# Altium PCB TelescopeHeater.PcbDoc
Units mil, origin at the board's own origin, x right, y up, seen from the top; angles counter-clockwise.
Board outline 984.14 x 1320.75 mil, 2 copper layers (Top Layer, Bottom Aluminium); 42 components, 25 nets, 118 pads, 0 vias.
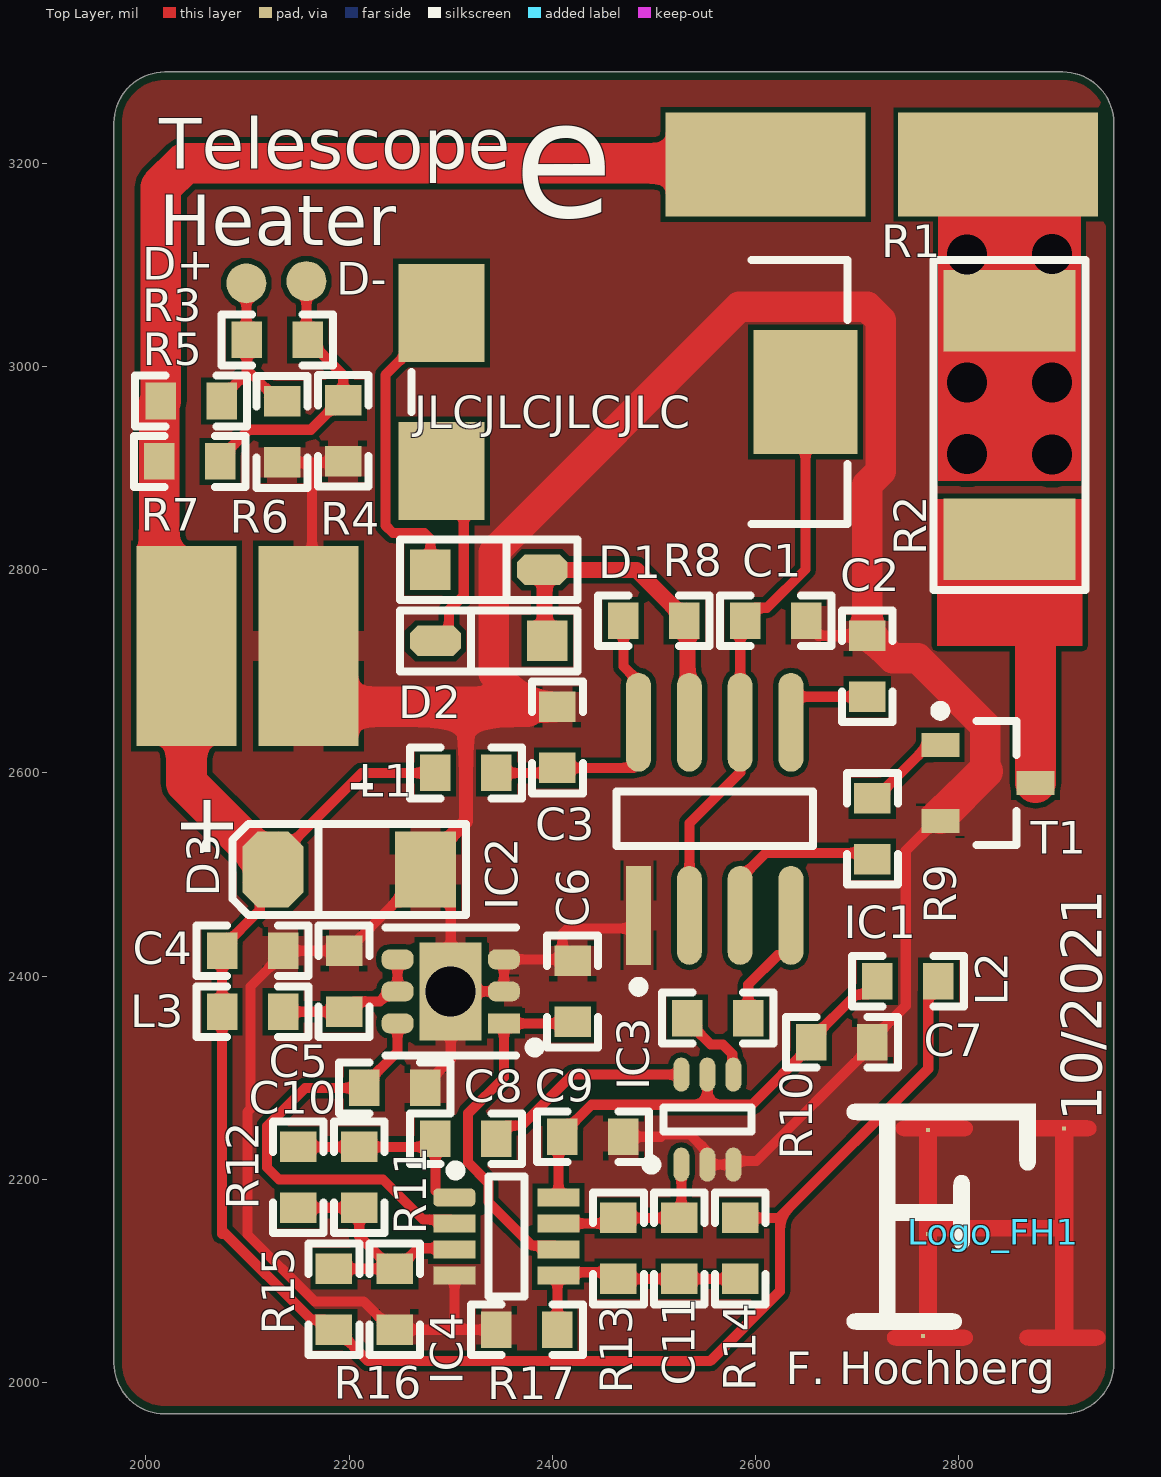
[diagram p0: Top Layer view]
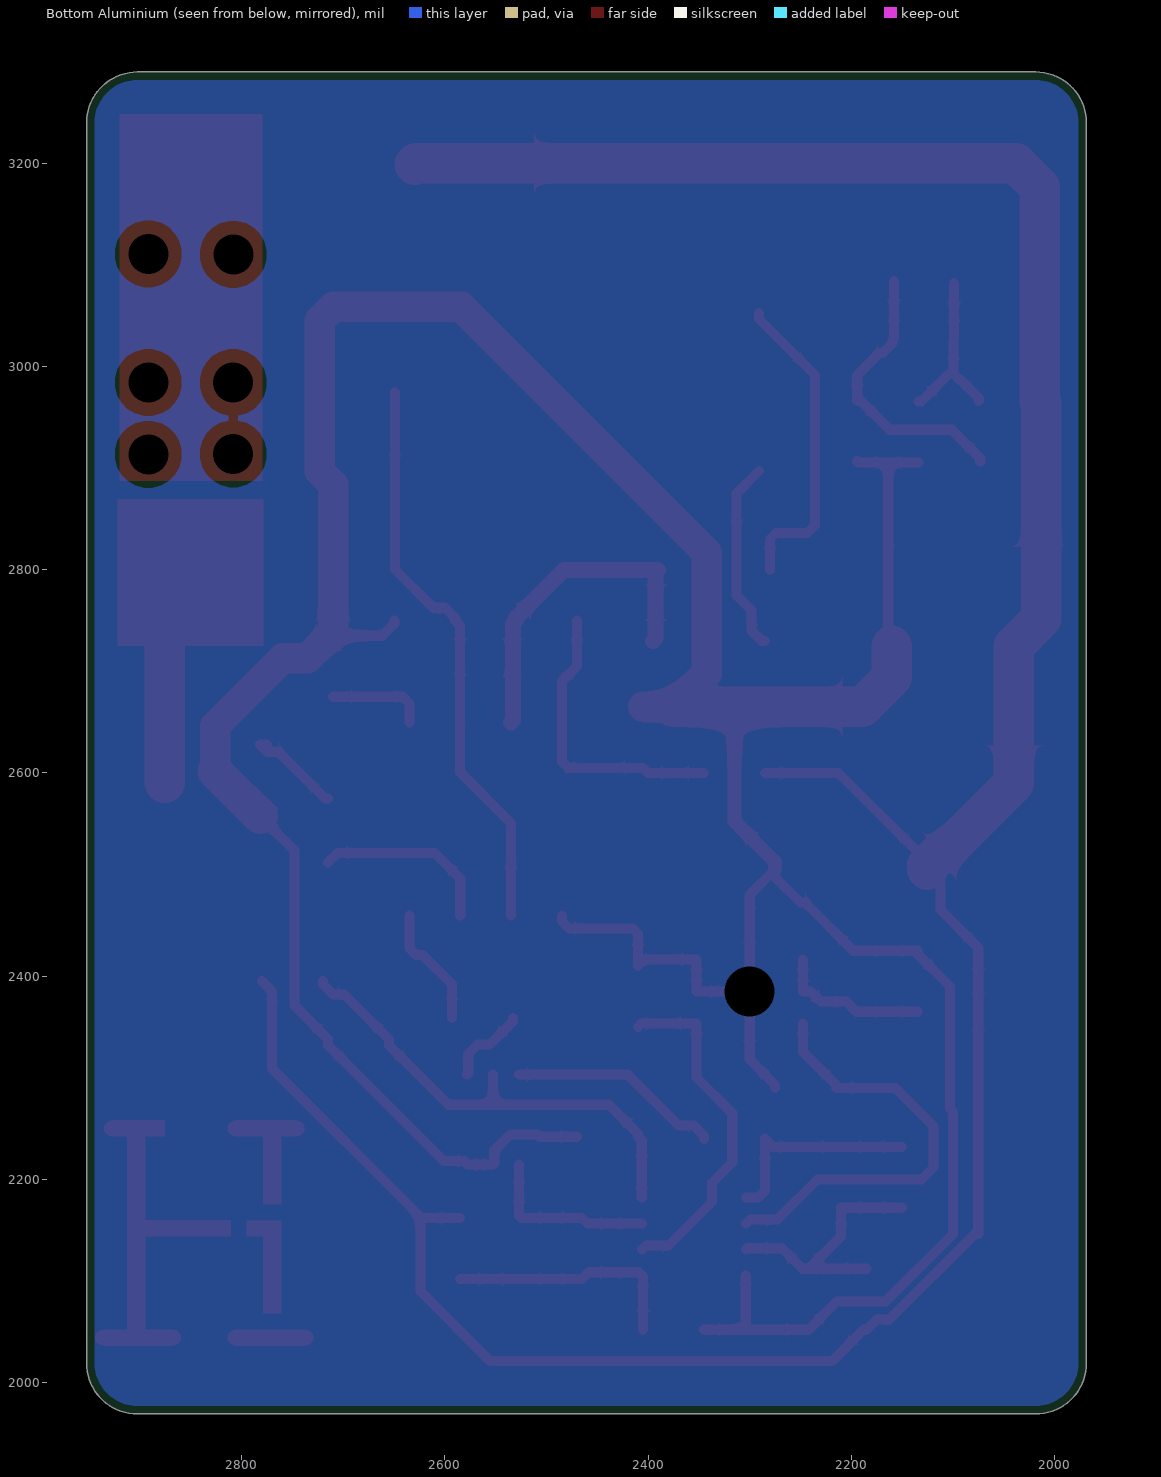
[diagram p1: Bottom Aluminium view, seen from below]
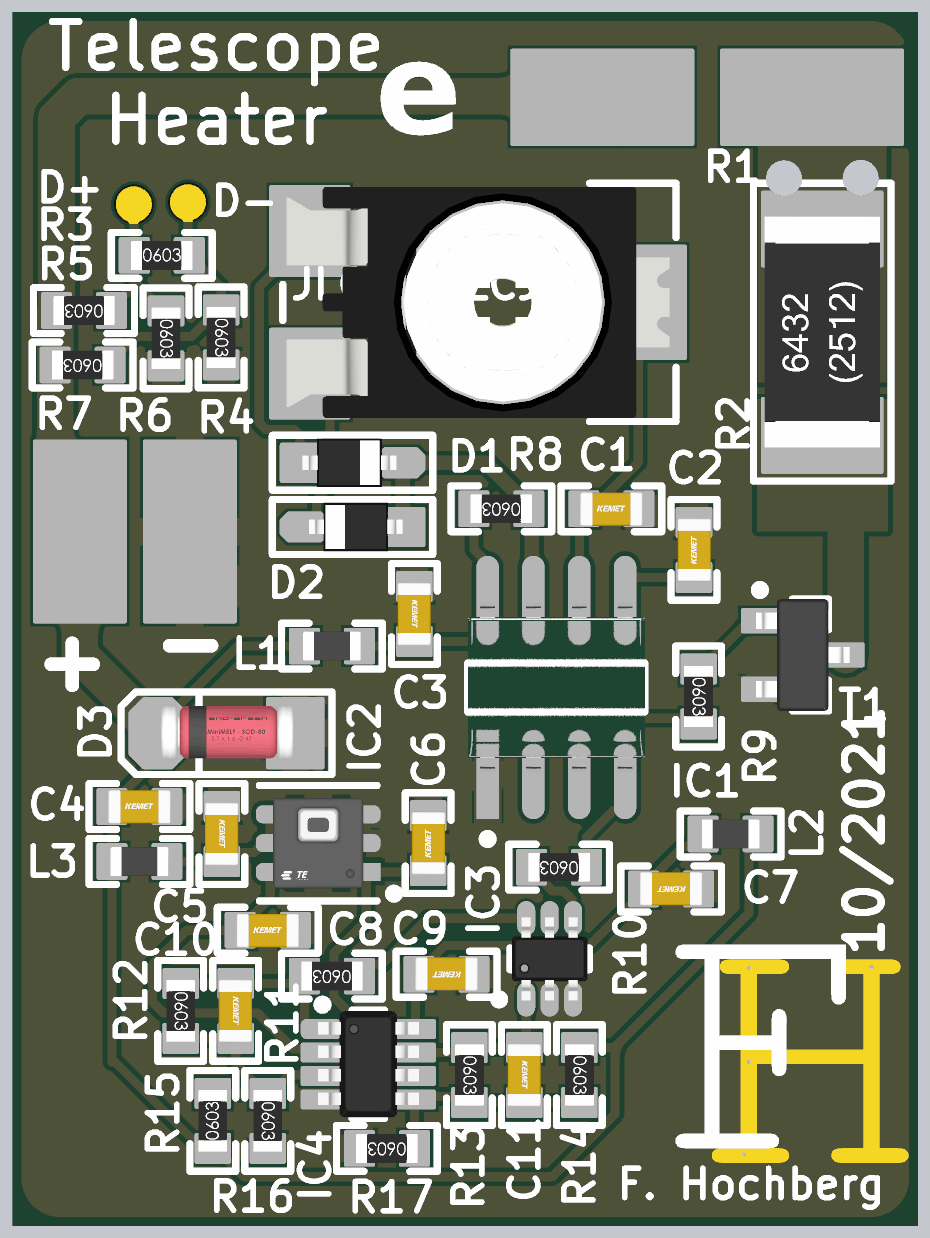
[diagram p2: 3D render of the assembled board from above, using the file's embedded part models]

## Layer stack, top to bottom
Top Solder: solder mask 0.4, Solder Resist, Dk 3.5
Top Layer: signal copper 1.4
Dielectric 1: dielectric 12.6, FR-4, Dk 4.8
Bottom Aluminium: signal copper 1.4

## Board outline
2018.53,1969.2 cw(c2018.53,2019.2) 1968.53,2019.2 1968.53,3239.95 cw(c2018.53,3239.95) 2018.53,3289.95 2902.57,3289.95 cw(c2902.57,3239.95) 2952.57,3239.95 2952.57,2979.8 cw(c2952.57,2979.68) 2952.68,2979.68 2952.68,2019.42 cw(c2952.57,2019.42) 2952.57,2019.31 ccw(c2952.68,2019.31) 2952.68,2019.2 cw(c2902.68,2019.2) 2902.68,1969.2

## Design rules (kind name [scope] priority, off if disabled: settings)
BoardOutlineClearance [All] p1: gap=7.87 ignorepadtopadclearanceinfootprint=FALSE except(15.75: Arc-SplitBarrior Arc-SplitContinuation Track-SplitBarrior Track-SplitContinuation SMDPad-SplitBarrior SMDPad-SplitContinuation THPad-SplitBarrior THPad-SplitContinuation Via-SplitBarrior Via-SplitContinuation Fill-SplitBarrior Fill-SplitContinuation Poly-SplitBarrior Poly-SplitContinuation Region-SplitBarrior Region-SplitContinuation Text-SplitBarrior Text-SplitContinuation)
Clearance [All] p1: gap=5 ignorepadtopadclearanceinfootprint=TRUE except(0: Arc-Text Track-Text Via-Text Fill-Text Poly-Text Region-Text Text-Text Text-Hole; 5.91: SMDPad-Text THPad-Text; 7.87: Arc-SMDPad Track-SMDPad; 10: Arc-Via Arc-Hole Track-Via Track-Hole SMDPad-THPad SMDPad-Via SMDPad-Hole Via-Via Via-Hole Fill-Hole Poly-Hole Region-Hole; 12.99: Arc-THPad Track-THPad THPad-Fill THPad-Poly THPad-Region Via-Fill Via-Poly Via-Region; 19.68: THPad-THPad THPad-Via THPad-Hole)
DiffPairsRouting [All] p1: maxlimit=10 minlimit=3.54 mostfreqgap=10 toplayer_minwidth=3.54 toplayer_maxwidth=15 toplayer_prefwidth=15 bottomlayer_minwidth=3.54 bottomlayer_maxwidth=15 bottomlayer_prefwidth=15 maxuncoupledlength=500
HoleSize [All] p1: absolutevalues=TRUE maxlimit=248.03 minlimit=11.81 maxpercent=80.000 minpercent=20.000
MinimumAnnularRing [All] p1: minimumring=5.12
MinimumSolderMaskSliver [All] p1: minsoldermaskwidth=3.94
PasteMaskExpansion [All] p1: expansion=1.97
PolygonConnect [All vs IsNamedPolygon('GND_L02_P002')] p1: thpad.connectstyle=Direct thpad.reliefconductorwidth=10 thpad.reliefentries=4 thpad.polygonreliefangle="90 Angle" thpad.airgapwidth=10 smdpad.connectstyle=Direct smdpad.reliefconductorwidth=10 smdpad.reliefentries=4 smdpad.polygonreliefangle="90 Angle" smdpad.airgapwidth=10 via.connectstyle=Relief via.reliefconductorwidth=10 via.reliefentries=4 via.polygonreliefangle="90 Angle" via.airgapwidth=10
PolygonConnect PolygonConnect_1 [All] p2: thpad.connectstyle=Relief thpad.reliefconductorwidth=30 thpad.reliefentries=4 thpad.polygonreliefangle="90 Angle" thpad.airgapwidth=5 smdpad.connectstyle=Relief smdpad.reliefconductorwidth=30 smdpad.reliefentries=4 smdpad.polygonreliefangle="90 Angle" smdpad.airgapwidth=5 via.connectstyle=Direct via.reliefconductorwidth=20 via.reliefentries=4 via.polygonreliefangle="90 Angle" via.airgapwidth=10
RoutingCorners [All] p1: cornerstyle=Round minsetback=100 maxsetback=100
RoutingVias [All] p1: holewidth=11.81 width=17.72 viastyle="Through Hole" minholewidth=11.81 minwidth=23.62 maxholewidth=248.03 maxwidth=78.74
SilkToSilkClearance [All] p1: silktosilkclearance=0
SilkToSolderMaskClearance [IsPad] p1: minsilkscreentomaskgap=1.97 clearancetoexposedcopper=TRUE
SolderMaskExpansion [All] p1: expansion=1.97 istentingtop=FALSE
UnRoutedNet [All] p1: checkbadconnections=TRUE
Width [All] p1: maxlimit=787.4 minlimit=5 preferedwidth=15 minimp=50.000000 maximp=50.000000 favimp=50.000000
22 further rules are at their usual default settings.

## Components (designator, comment, footprint, x,y, rotation, side; value= is the part's Value field where it differs from the comment)
C1 "4.7n_50V" 0603_C 2619.84,2749.82 r0 top value=4.7n (schematic designator C4)
C2 "10n_50V" 0603_C 2710,2705 r90 top value=10n (schematic designator C3)
C3 "100n_50V" 0603_C 2405,2635 r270 top value=100n (schematic designator C2)
C4 "1u_16V" 0603_C 2105,2425 r0 top value=1u (schematic designator C1)
C5 "100n_50V" 0603_C 2195,2395 r270 top value=100n
C6 "1n_50V" 0603_C 2420,2385 r90 top value=1n
C7 "100n_50V" 0603_C 2685,2335 r180 top value=100n (schematic designator C9)
C8 "1n_50V" 0603_C 2245,2290 r0 top value=1n (schematic designator C7)
C9 "100n_50V" 0603_C 2440,2241.99 r180 top value=100n (schematic designator C8)
C10 "2.2p_50V" 0603_C 2210,2201.99 r270 top value=2.2p (schematic designator C11)
C11 "2.2p_50V" 0603_C 2525,2131.99 r270 top value=2.2p (schematic designator C10)
D1 "CUS357" SOD323 2280,2800 r0 top (schematic designator D2)
D2 "CUS357" SOD323 2395,2730 r180 top (schematic designator D3)
D3 "5.6V" MINIMELF-SOD80 2125,2505 r0 top (schematic designator D1)
D+ "Testpad" Testpad_1mm 2098.88,3081.97 r90 top
D- "Testpad" Testpad_1mm 2157.95,3084.11 r180 top
IC1 "NE555DR" FP-D0008A-IPC_A 2559.84,2554.82 r90 top
IC2 "HTU31V" HTU31D/V-MFG 2300,2385 r180 top
IC3 "‎SN74LVC1G58DCKR‎" SOT-363 2578.17,2299.14 r90 top (schematic designator IC4)
IC4 "TLV9352" SOT23-8 2354.7,2143.77 r0 top (schematic designator IC3)
L1 "100 Ohm @ 100MHz" 0603_L 2315,2600 r180 top
L2 "100 Ohm @ 100MHz" 0603_L 2750,2395 r180 top (schematic designator L3)
L3 "100 Ohm @ 100MHz" 0603_L 2105,2365 r180 top (schematic designator L2)
Logo_FH1 "Logo" "Logo FH" 2807.95,2130.07 r0 top (schematic designator Logo_FH)
R1 "10k" PIHER_N-6-R_Poti 2470,2975 r180 top (schematic designator R2)
R2 "7.5" 2512_R 2850,2830 r90 top (schematic designator R5)
R3 "n.b." 0603_R 2129.31,3026.22 r0 top (schematic designator R15)
R4 "n.b." 0603_R 2194.16,2936.76 r270 top (schematic designator R17)
R5 "n.b." 0603_R 2044.49,2966.12 r180 top (schematic designator R13)
R6 "n.b." 0603_R 2134.01,2935.68 r270 top (schematic designator R14)
R7 "n.b." 0603_R 2043.05,2906.67 r180 top (schematic designator R16)
R8 "330" 0603_R 2499.84,2749.82 r180 top (schematic designator R1)
R9 "100" 0603_R 2715,2545 r270 top
R10 "0" 0603_R 2562.85,2358.76 r180 top (schematic designator R12)
R11 "0" 0603_R 2315,2240 r180 top (schematic designator R7)
R12 "330k" 0603_R 2150,2201.99 r270 top (schematic designator R8)
R13 "330k" 0603_R 2465,2131.99 r270 top (schematic designator R6)
R14 "22k" 0603_R 2585,2131.99 r270 top (schematic designator R3)
R15 "47k" 0603_R 2185,2081.99 r90 top (schematic designator R4)
R16 "33k" 0603_R 2245,2081.99 r270 top (schematic designator R11)
R17 "47k" 0603_R 2375,2051.99 r180 top (schematic designator R10)
T1 "Si2302CDS" SOT23-3 2828.72,2590.34 r0 top

## Footprints (in the part's own frame and the unit in brackets; to place one, negate y for a bottom-side part, rotate by r counter-clockwise, add the part's x,y. Pads: shape width x height; smd on the part's side, far side on the other; paste and mask are expansions set on the pad)
0603_C [mil] "Passiv"
  rect 30x36 smd: 1(-30,0) 2(30,0)
  silkscreen extent -55,-25 55,25, body extent -34,-19 34,18, height 35
0603_L [mil] "Passiv"
  rect 30x36 smd: 1(-30,0) 2(30,0)
  silkscreen extent -55,-25 55,25, body extent -32,-16 31,16, height 31
0603_R [mil] "Passiv"
  rect 30x36 smd: 1(-30,0) 2(30,0)
  silkscreen extent -55,-25 55,25, body extent -33,-16 33,16, height 22
2512_R [mil]
  rect 80x130 smd: 1(0,0) 2(225,0)
  silkscreen extent -50,-75 275,75, body extent -13,-63 238,63, height 24
FP-D0008A-IPC_A [mil]
  rect 97.21x24.49 smd paste+0 mask+0: 1(-95.02,75)
  rrect100% 97.21x24.49 smd paste+0 mask+0: 2(-95.02,25) 3(-95.02,-25) 4(-95.02,-75) 5(95.02,-75) 6(95.02,-25) 7(95.02,25) 8(95.02,75)
  silkscreen extent -170,-97 27,97, body extent -163,-116 163,116, height 10
HTU31D/V-MFG [mm]
  rect 0.8x0.5 smd paste+0 mask+0: 1(-1.33,0.8)
  rrect80% 0.8x0.5 smd paste+0 mask+0: 2(-1.33,0) 3(-1.33,-0.8) 4(1.33,-0.8) 5(1.33,0) 6(1.33,0.8)
  rect 1.55x2.45 smd paste+0 mask+0: 7(0,0)
  silkscreen extent -2.23,-1.6 1.63,1.6, body extent -1.63,-1.38 1.63,1.38, height 0.25
"Logo FH" [mm]
  rect 0.1x0.1 smd paste+0 mask+0: 1(-0.97,3.004) 2(2.43,3.05) 3(-0.97,0.41) 4(-1.1,-2.14)
  Top Layer region: -1.679,2.888 -1.668,2.882 -1.656,2.877 -1.643,2.873 -1.63,2.869 -1.617,2.865 -1.604,2.862 -1.591,2.86 -1.578,2.857 -1.566,2.856 -1.553,2.854 -1.539,2.853 -1.525,2.852 -1.511,2.851 -1.498,2.851 -1.485,2.85 -1.471,2.85 -1.193,2.85 -1.193,1.152 -0.747,1.152 -0.747,2.85 -0.147,2.85 -0.134,2.85 -0.121,2.851 -0.107,2.851 -0.093,2.852 -0.079,2.853 -0.066,2.854 -0.054,2.856 -0.04,2.858 -0.027,2.86 -0.014,2.863 0,2.866 0.012,2.87 0.025,2.874 0.037,2.879 0.049,2.884 0.061,2.89 0.073,2.898 0.084,2.906 0.095,2.916 0.104,2.925 0.112,2.936 0.117,2.943 0.122,2.949 0.122,2.949 0.129,2.963 0.136,2.977 0.136,2.977 0.139,2.985 0.141,2.992 0.141,2.992 0.144,3.004 0.147,3.019 0.149,3.033 0.149,3.046 0.149,3.059 0.149,3.072 0.147,3.086 0.144,3.1 0.142,3.107 0.14,3.115 0.14,3.115 0.131,3.135 0.121,3.153 0.121,3.153 0.117,3.159 0.113,3.164 0.113,3.164 0.104,3.175 0.095,3.184 0.085,3.192 0.074,3.201 0.063,3.209 0.051,3.216 0.04,3.221 0.027,3.227 0.015,3.231 0.002,3.235 -0.011,3.239 -0.024,3.242 -0.037,3.245 -0.051,3.247 -0.065,3.249 -0.078,3.25 -0.091,3.251 -0.105,3.252 -0.119,3.253 -0.132,3.253 -0.145,3.253 -1.47,3.253 -1.483,3.253 -1.497,3.253 -1.51,3.252 -1.524,3.252 -1.538,3.251 -1.551,3.249 -1.564,3.248 -1.577,3.246 -1.591,3.243 -1.604,3.24 -1.617,3.237 -1.63,3.233 -1.642,3.229 -1.654,3.224 -1.667,3.219 -1.678,3.212 -1.69,3.205 -1.701,3.197 -1.712,3.188 -1.722,3.178 -1.728,3.173 -1.733,3.167 -1.733,3.167 -1.745,3.149 -1.755,3.131 -1.755,3.131 -1.758,3.124 -1.761,3.118 -1.761,3.118 -1.765,3.105 -1.768,3.092 -1.77,3.079 -1.771,3.066 -1.771,3.053 -1.771,3.039 -1.77,3.026 -1.768,3.012 -1.765,2.999 -1.762,2.991 -1.76,2.983 -1.76,2.983 -1.754,2.969 -1.747,2.956 -1.747,2.956 -1.743,2.949 -1.739,2.942 -1.739,2.942 -1.731,2.932 -1.721,2.921 -1.711,2.91 -1.701,2.902 -1.691,2.895
  Top Layer region: 183 vertices and 0 holes, not listed, extent 0.077,-2.382 3.461,3.253
  Top Layer region: -1.91,-2.336 -1.898,-2.343 -1.886,-2.349 -1.874,-2.355 -1.862,-2.359 -1.85,-2.363 -1.836,-2.367 -1.824,-2.37 -1.811,-2.373 -1.797,-2.375 -1.783,-2.377 -1.77,-2.379 -1.757,-2.38 -1.743,-2.381 -1.729,-2.382 -1.716,-2.382 -1.703,-2.382 -0.146,-2.382 -0.133,-2.382 -0.12,-2.382 -0.106,-2.381 -0.092,-2.38 -0.078,-2.379 -0.065,-2.378 -0.053,-2.376 -0.039,-2.374 -0.026,-2.371 -0.013,-2.368 0,-2.365 0.013,-2.361 0.025,-2.356 0.038,-2.351 0.05,-2.345 0.062,-2.338 0.073,-2.331 0.083,-2.322 0.094,-2.313 0.103,-2.303 0.111,-2.294 0.119,-2.283 0.123,-2.277 0.127,-2.271 0.127,-2.271 0.133,-2.258 0.138,-2.246 0.138,-2.246 0.141,-2.239 0.143,-2.232 0.143,-2.232 0.146,-2.218 0.148,-2.205 0.149,-2.192 0.15,-2.178 0.149,-2.165 0.148,-2.152 0.146,-2.139 0.142,-2.126 0.14,-2.118 0.137,-2.111 0.138,-2.111 0.13,-2.095 0.121,-2.079 0.121,-2.079 0.117,-2.074 0.113,-2.068 0.113,-2.068 0.104,-2.057 0.095,-2.048 0.085,-2.04 0.074,-2.031 0.063,-2.024 0.051,-2.017 0.04,-2.011 0.027,-2.006 0.015,-2.001 0.002,-1.997 -0.011,-1.993 -0.024,-1.99 -0.037,-1.988 -0.051,-1.986 -0.065,-1.984 -0.078,-1.982 -0.091,-1.981 -0.105,-1.98 -0.119,-1.98 -0.132,-1.979 -0.145,-1.979 -1.697,-1.979 -1.71,-1.979 -1.723,-1.979 -1.737,-1.98 -1.751,-1.981 -1.765,-1.982 -1.778,-1.983 -1.791,-1.985 -1.804,-1.987 -1.818,-1.99 -1.83,-1.993 -1.844,-1.996 -1.857,-2 -1.869,-2.004 -1.882,-2.01 -1.893,-2.016 -1.905,-2.022 -1.916,-2.029 -1.927,-2.038 -1.938,-2.047 -1.949,-2.057 -1.953,-2.063 -1.958,-2.068 -1.958,-2.068 -1.969,-2.084 -1.978,-2.102 -1.978,-2.102 -1.981,-2.108 -1.984,-2.114 -1.984,-2.114 -1.988,-2.128 -1.991,-2.14 -1.993,-2.153 -1.994,-2.166 -1.994,-2.179 -1.994,-2.193 -1.993,-2.206 -1.991,-2.22 -1.989,-2.227 -1.987,-2.235 -1.987,-2.235 -1.982,-2.249 -1.976,-2.262 -1.976,-2.262 -1.972,-2.269 -1.968,-2.276 -1.968,-2.276 -1.96,-2.288 -1.951,-2.299 -1.942,-2.309 -1.932,-2.319 -1.921,-2.328
  Top Layer region: -1.193,-1.574 -0.747,-1.574 -0.747,0.354 -0.333,0.354 -0.333,0.746 -1.193,0.746
  Top Layer lines w0.2: 2.88,2.97 2.96,2.97
  silkscreen extent -3,-1.98 1.73,3.67
MINIMELF-SOD80 [mil] "Diode"
  rect 60x75 smd: 1(150,0)
  oct 60x75 smd: 2(0,0)
  silkscreen extent -40,-45 190,45, body extent 3,-30 149,33, height 63
PIHER_N-6-R_Poti [mm]
  rect 2.15x2.45 smd: 1(4.55,1.975) 2(4.55,-1.975)
  rect 2.6x3.1 smd: 3(-4.55,0)
  silkscreen extent -5.6,-3.3 5.3,3.3, body extent -5.42,-3.2 5.19,3.2, height 6.2
SOD323 [mil] "Diode (zus. Namen: SC-90A)"
  rect 40x40 smd: 1(0,0)
  oct 50x30 smd: 2(110,0)
  silkscreen extent -30,-30 145,30, body extent 3,-27 105,27, height 43
SOT23-3 [mm]
  rect 0.95x0.6 smd: 1(-1.19,0.95) 2(-1.19,-0.95) 3(1.19,0)
  silkscreen extent -1.31,-1.55 0.71,1.92, body extent -1.3,-1.55 1.3,1.55, height 1.15
SOT23-8 [mm] "SOT23, 8-Leads, Body 2,90x2,80mm, Pitch 0,65mm, IPC High Density"
  rrect50% 1.05x0.45 smd: 1(-1.3,0.975)
  rect 1.05x0.45 smd: 2(-1.3,0.325) 3(-1.3,-0.325) 4(-1.3,-0.975) 5(1.3,-0.975) 6(1.3,-0.325) 7(1.3,0.325) 8(1.3,0.975)
  silkscreen extent -1.39,-1.5 0.45,1.78, body extent -1.4,-1.47 1.4,1.47, height 1.2
SOT-363 [mm] "SC-88 SC70-6"
  oval 0.85x0.4 smd: 1(-2.15,1.3) 2(-2.15,0.65) 3(-2.15,0) 4(0.1,0) 5(0.1,0.65) 6(0.1,1.3)
  silkscreen extent -2.27,-0.45 -0.72,2.17, body extent -2.17,-0.4 0.13,1.7, height 1
Testpad_1mm [mm]
  round 1 smd paste-2: 1(0,0)

## Part data
C1 C2 C3 C5 C6 C7 C8 C9 C10 C11: library part C, "Keramikkondensator", Voltage=50V
C4: library part C, "Keramikkondensator", Voltage=16V
D1 D2: library part "Schottky Diode", "Schottky Diode"
D3: library part "Zener Diode", "Zener Diode", Voltage=5.6V
IC1: library part CMP-1685-00007-2, "IC OSC SGL TIMER 100KHZ 8-SOIC", Case/Package=SOIC, Frequency=100kHz, High Level Output Current=-200mA, Low Level Output Current=200mA, Max Operating Temperature=70°C, Max Supply Voltage=16V, Min Operating Temperature=0°C, Min Supply Voltage=4.5V, Operating Supply Current=10mA, Package Quantity=2500, Quiescent Current=15mA, Contact Plating=Gold, Height=1.58mm, Lead Free="Lead Free", Length=4.9mm, Mount="Surface Mount", Number of Pins=8, Number of Timers/Counters=1, Packaging="Tape and Reel", Radiation Hardening=No, REACH SVHC="No SVHC", Weight=0.002561oz, Width=3.91mm
IC2: library part "HTU31V RH/T", "Analog Relative Humidity sensor with Temperature output", Ambient Temperature Range High=+125°C, Ambient Temperature Range Low=-40°C, Manufacturer=TE, Manufacturer Part Number=HTU31D, Max Supply Voltage=5.5V, Min Supply Voltage=3V, Operating Supply Current=450uA, Package=0, Temperature="-40°C to +125°C", Accuracy=2%, Automotive=Yes, Automotive Grade="Grade 1", Category=IC, ComponentLink2Description=Datasheet, ComponentLink2URL=https://www.te.com/commerce/DocumentDelivery/DDEController?Action=showdoc&DocId=Data+Sheet%7FHTU31D-RHT-SENSOR-IC-DIGITAL%7FA1%7Fpdf%7FEnglish%7FENG_DS_HTU31D-RHT-SENSOR-IC-DIGITAL_A1.pdf%7F10142020-00, Device Class L1=Sensors, Device Class L2="Temperature and Humidity Sensors", Device Class L3=unset, Height=1mm, Interface=Analog, Ipc Land Pattern Name=DFN250X250X100-6, Lead Free=Yes, Octopart=https://octopart.com/htu31d-te+connectivity-108994149, RoHS=TRUE, Sensor Output=I2C, Standoff Height=0mm, Temperature Range High=+125°C, Temperature Range Low=-40°C
IC3: library part "Conf. Logic Gate", "Low-power configurable multiple function gate"
IC4: library part "Dual OP Amp", "OP / Comparator"
L1 L2 L3: library part L, "0,15 Ohm 1A max / 100 Ohm @ 100MHz", EBS_Nummer=10111, HelpURL=https://ebs.eti.kit.edu/Artikel/Detailansicht/10111
Logo_FH1: "8x8 mm Logo Fabian Hochberg"
R1: library part Poti, "Poti"
R2 R3 R4 R5 R6 R7 R8 R9 R10 R11 R12 R13 R14 R15 R16 R17: library part R, "R"
T1: library part "Signal N-MOSFET", "N-Channel 20-V (D-S) MOSFET"

## Free pads (board coordinates)
  rect 98.43x196.85 smd: 1(2040,2725) 2(2160,2725)
  rect 196.85x102.36 smd: 3(2610,3198.82) 4(2838.88,3198.82)
  round 0 hole 49.21 unplated paste-99999 mask+0: q(2300,2385)
  round 31.5 hole 39.37 unplated: q(2808.29,3110.46) q(2808.31,2914.07) q(2808.31,2984.25) q(2891.93,2913.64) q(2891.93,2984.25) q(2891.94,3110.88)

## Nets (pads, with @x,y where several pads share a name; then routed paths per layer and width w, separated by ;. In a path a pad name is that pad's centre, name@x,y a point inside that pad or via, vN(x,y) a via of type N, cw(c..) or ccw(c..) an arc to the next point about the centre after c; other vN are vias at no path point)
+5: C4.1 D3.2 L1.2 L2.1 L3.2 pad.1 pad.3 R5.2 R7.2 R14.1 R15.1 | length 2962.8
  Top Layer w10: 2075,2146.41 2075,2252.73 L3.2 C4.1 2075,2428 2112.07,2465.07 2112.07,2492.07 D3.2 ; 2076.58,2147.99 2162.58,2061.99 2175,2061.99 R15.1 2188,2051.99 2218.87,2021.12 2555.33,2021.12 2623.99,2089.78 2623.99,2162.89 ; D3.2@2125,2509.22 2125,2512.5 2212.5,2600 L1.2 ; R14.1 2623.1,2161.99 2623.99,2162.89 ; L2.1 2770,2385 2770,2308.89 2623.99,2162.89
  Top Layer w40: D3.2 2125,2509.22 2115,2519.22 2110.78,2519.22 2040,2590 pad.1 2013.05,2751.95 R7.2 2013.05,2964.68 R5.2 2014.49,3176.57 2037.92,3200 2628.48,3200 pad.3@2629.66,3198.82
+5_ANALOG: C7.2 C9.2 IC3.5 IC4.8 L2.2 | length 471.6
  Top Layer w10: IC4.8 2406.18,2182.46 2406.18,2238.18 C9.2 2410,2244.99 2438.48,2273.48 2552.57,2273.48 ; IC3.5 2552.57,2273.48 ; L2.2 2720,2392 2710,2382 2699,2382 2655,2338 C7.2 2655,2332 2596.48,2273.48 2552.57,2273.48
D+: D+.1 R3.1 R5.1 R6.1 | length 172.8
  Top Layer w10: R5.1 2074.49,2969.12 2091.56,2986.19 2092.28,2986.19 2099.31,2993.22 ; D+.1 2098.88,3026.65 R3.1 2099.31,2993.22 ; R6.1 2131.01,2965.68 2103.47,2993.22 2099.31,2993.22
D-: D-.1 R3.2 R4.1 R7.1 | length 281.9
  Top Layer w10: R7.1 2073.05,2909.67 2101.18,2937.81 2162.22,2937.81 2191.16,2966.76 R4.1 2194.16,2991.36 2172.31,3013.22 2169.31,3013.22 2159.31,3023.22 R3.2 2157.95,3027.58 D-.1
GND: C1.2 C2.2 C3.1 C4.2 C5.1 C6.2 C7.1 C8.2 C9.1 D3.1 IC1.1 IC2.2 IC2.3 IC2.7 IC3.2 IC3.3 IC4.4 Logo_FH1.1 Logo_FH1.2 Logo_FH1.3 Logo_FH1.4 pad.2 pad.q@2300,2385 R4.2 R6.2 R16.2 R17.2 T1.2 | length 3881.3
  Top Layer w10: R6.2 2163.55,2905.68 ; pad.2 2163.55,2728.55 2163.55,2905.68 ; R4.2 2193.09,2905.68 2163.55,2905.68 ; C8.2 2275,2293 2300,2318 IC2.7 ; IC4.4 2303.82,2105.08 2303.82,2058.18 2310,2051.99 ; R17.2 2310,2051.99 ; C9.1 2506.73,2241.99 2508.84,2244.11 2535.58,2244.11 2551.48,2228.21 2551.48,2215.6 IC3.2 IC3.3 2578.17,2215.38 2580.82,2218.04 2601.04,2218.04 2715,2332 C7.1 2715,2338 2747.87,2370.87 2747.87,2523.43 2768.17,2543.73 2768.17,2546.13 2779.47,2557.43 T1.2@2781.87,2557.43 ; IC1.1 2484.84,2454.22 2477.6,2446.97 2415.02,2446.97 2410,2441.95 2410,2410 2403.5,2416.5 IC2.3 IC2.2 IC2.7 ; C1.2 2649.84,2746.82 2661.66,2735 C2.2 ; IC2.7 2300,2480 D3.1 2275,2497.5 2250,2472.5 2245.5,2472.5 2198,2425 C5.1 C4.2 2135,2422 2102.87,2389.87 2102.87,2269.27 2100,2266.39 2100,2145.79 2165.92,2079.87 2214.13,2079.87 2242,2051.99 R16.2 2310,2051.99
  Top Layer w14: D3.1 2275,2512.5 2315,2552.5 2315,2665
  Top Layer w30: C3.1 2375,2665 2342.13,2697.87 2342.13,2816.97 2584.05,3058.9 2709.79,3058.9 2723.19,3045.5 2723.19,2896.84 2710,2883.65 C2.2 2713,2735 2735.13,2712.87 2759.6,2712.87 2825.95,2646.53 2825.95,2601.5
  Top Layer w35: T1.2@2781.87,2557.43 2825.95,2601.5
  Top Layer w40: pad.2 2160,2694.21 2189.21,2665 2315,2665 2375,2665
HEATER_SW: pad.4 pad.q@2808.29,3110.46 pad.q@2808.31,2914.07 pad.q@2808.31,2984.25 pad.q@2891.93,2913.64 pad.q@2891.93,2984.25 pad.q@2891.94,3110.88 R2.2
NetC1_1: C1.1 IC1.2 IC1.6 R1.3 | length 569.4
  Top Layer w10: IC1.2 2535,2459.96 2535,2550.66 2585,2600.66 2585,2649.69 IC1.6 2585,2650 2585,2744.98 C1.1 2589.84,2752.53 2599.84,2762.53 2611.35,2762.53 2649.13,2800.32 R1.3
NetC2_1: C2.1 IC1.5 | length 96.4
  Top Layer w10: IC1.5 2634.84,2668.3 2641.54,2675 C2.1
NetC3_2: C3.2 IC1.8 L1.1 R8.2 | length 289.1
  Top Layer w10: L1.1 2400,2600 C3.2 2478.3,2605 2484.84,2611.54 2484.84,2690.13 2470,2704.97 2470,2749.66 R8.2
NetC5_2: C5.2 IC2.4 IC2.5 L3.1 | length 152.4
  Top Layer w10: L3.1 C5.2 2205,2375 2230.18,2375 2240.18,2385 IC2.5 IC2.4
NetC6_1: C6.1 IC2.1 IC4.6 | length 346
  Top Layer w10: IC4.6 2402.02,2134.83 2379.87,2134.83 2337.06,2177.65 2337.06,2196.74 2317.13,2216.67 2317.13,2265.05 2352.36,2300.28 IC2.1 2406.5,2353.5 C6.1@2410,2350
NetC8_1: C8.1 IC2.6 IC4.2 | length 436.4
  Top Layer w10: IC2.6 2247.64,2325.64 2215,2293 C8.1 2156.8,2290 2119.13,2252.33 2119.13,2211.66 2130.92,2199.87 2233.33,2199.87 2272.78,2160.42 2299.66,2160.42 IC4.2
NetC10_1: C10.1 IC4.1 R11.2 R12.1 | length 210.8
  Top Layer w10: R12.1 C10.1 2276.99,2231.99 R11.2 2285,2188.85 2291.7,2182.15 IC4.1
NetC10_2: C10.2 IC4.3 R12.2 R15.2 R16.1 | length 260.6
  Top Layer w10: R12.2 C10.2 2210,2143.99 R16.1@2242,2111.99 ; R15.2 R16.1@2242,2111.99 ; IC4.3 2302.34,2132.14 2301.76,2132.14 2268.15,2132.14 2248,2111.99 R16.1 R16.1@2242,2111.99
NetC11_1: C11.1 IC3.1 IC4.7 R13.1 | length 174.7
  Top Layer w10: IC4.7 2459.57,2156.56 R13.1 C11.1 2526.98,2163.98 IC3.1
NetC11_2: C11.2 IC4.5 R13.2 R14.2 R17.1 | length 246
  Top Layer w10: R17.1 2405,2104.5 IC4.5 ; IC4.5@2406.18,2105.38 2409.38,2108.58 R13.2@2458.35,2108.58 ; R14.2 C11.2 R13.2 ; R13.2 2458.39,2108.61 R13.2
NetD1_1: D1.1 R1.2 | length 312.1
  Top Layer w10: D1.1 2280,2830.28 2274.14,2836.14 2243.21,2836.14 2235.67,2843.68 2235.67,2991.65 2290.87,3046.85 R1.2
NetD1_2: D1.2 D2.1 IC1.7 R8.1 | length 336.5
  Top Layer w15.75: D2.1 2392.5,2732.5 2392.5,2797.5 D1.2 2482.66,2800 2529.84,2752.82 R8.1 2533.17,2746.5 2533.17,2651.52 IC1.7
NetD2_2: D2.2 R1.1 | length 189.8
  Top Layer w10: D2.2 2288.21,2730 2298.21,2740 2298.21,2760 2312.87,2774.67 2312.87,2875.24 R1.1
NetIC1_3: IC1.3 R9.2 | length 180.8
  Top Layer w10: IC1.3 2584.84,2496.16 2609.96,2521.28 2705.72,2521.28 R9.2@2715,2511.99
NetIC1_4: IC1.4 R10.1 | length 122.2
  Top Layer w10: R10.1 2592.85,2391.76 2621.75,2420.67 2628.15,2420.67 2634.84,2427.36 IC1.4
NetIC3_4: IC3.4 R10.2 | length 81.4
  Top Layer w10: R10.2 2532.85,2355.76 2555.92,2332.69 2567.72,2332.69 2577.07,2323.34 2577.07,2304.18 IC3.4
NetIC3_6: IC3.6 R11.1 | length 209.9
  Top Layer w10: R11.1 2345,2243 2355,2253 2369.8,2253 2419.88,2303.08 IC3.6
NetR2_1: R2.1 T1.3 | length 253.5
  Top Layer w40: R2.1 2855.57,2830 2875.57,2810 T1.3
NetR9_1: R9.1 T1.1 | length 95.6
  Top Layer w10: R9.1 2718,2575 2763.93,2620.93 2775.06,2620.93 T1.1 T1.1@2774.98,2627.74

## Polygon pours and split planes (outlines as drawn)
GND on Bottom Aluminium "GND_L02_P002" (solid, pour order 2): 2415.9,3336.5 3007.35,3336.5 3007.35,1840.82 1907.86,1840.82 1907.86,3338.39
GND on Top Layer "GND_L01_P001" (solid, pour order 1): 2222.4,3366.49 2910.86,3366.49 cw(c2910.86,3266.49) 3010.86,3266.49 3010.86,2016.74 cw(c2910.86,2016.74) 2910.86,1916.74 2011.53,1916.74 cw(c2011.53,2016.74) 1911.53,2016.74 1911.53,3263.67 cw(c2011.53,3263.67) 2011.53,3363.67 2066.96,3363.67

## Other copper
Top Layer:
  region net NetR2_1: 2778.66,2869.54 2921.78,2869.54 2921.78,2725.22 2778.66,2725.22
  region net HEATER_SW: 2780,3248.56 2780,2887.78 2920,2887.78 2920,3248.56

## Silkscreen, mask and mechanical layers (free items; w line width, h text height)
Top Overlay:
  text "Telescope  / Heater" at 2013.19,3119.56 h50
  text "e" at 2361.98,3109.1 h200
  text "JLCJLCJLCJLC" at 2264.1,2939.17 h32
  text "-" at 2227.91,2609.12 h60 r180
  text "+" at 2086.04,2513.02 h60 r90
  text "10/2021" at 2940.68,2257.02 h40 r90
Outline:
  lines w0: 2952.57,2979.8 2952.57,3239.95 ccw(c2902.57,3239.95) 2902.57,3289.95 2018.53,3289.95 ccw(c2018.53,3239.95) 1968.53,3239.95 1968.53,2019.2 ccw(c2018.53,2019.2) 2018.53,1969.2 2067.36,1969.2 2902.68,1969.2 ccw(c2902.68,2019.2) 2952.68,2019.2 cw(c2952.68,2019.31) 2952.57,2019.31 ccw(c2952.57,2019.42) 2952.68,2019.42 2952.68,2979.68
Mechanical 15:
  lines w7.87: 1968.53,2019.2 ccw(c2018.53,2019.2) 2018.53,1969.2 2067.36,1969.2 2902.68,1969.2 ccw(c2902.68,2019.2) 2952.68,2019.2 cw(c2952.68,2019.31) 2952.57,2019.31 ccw(c2952.57,2019.42) 2952.68,2019.42 2952.68,2979.68 ccw(c2952.57,2979.68) 2952.57,2979.8 2952.57,3239.95 ccw(c2902.57,3239.95) 2902.57,3289.95 2018.53,3289.95 ccw(c2018.53,3239.95) 1968.53,3239.95 1968.53,2019.2

## Text inside footprints (layer, text, board x,y; h text height)
Logo_FH1: Top Overlay "F. Hochberg" at 2629.94,1998.29 h32